# Altium PCB pcb.PcbDoc
Units mil, origin at the board's own origin, x right, y up, seen from the top; angles counter-clockwise.
Board outline 6000 x 4000 mil, 2 copper layers (Top Layer, Bottom Layer); 116 components, 74 nets, 350 pads, 0 vias.
Unrouted connection lines stored in the file: 217.
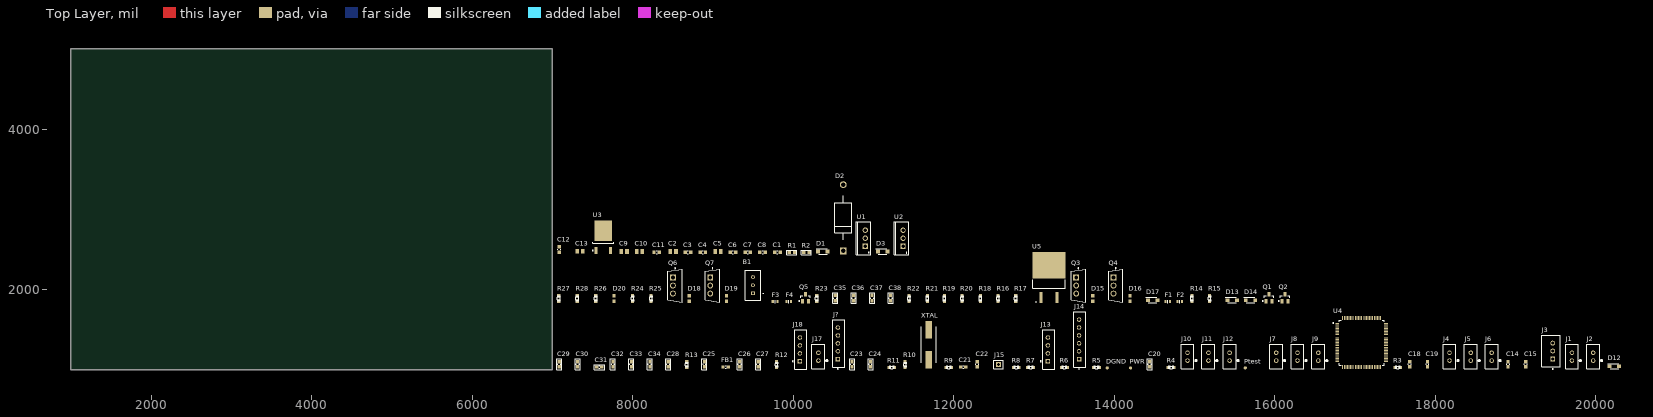
[diagram p0: Top Layer view]
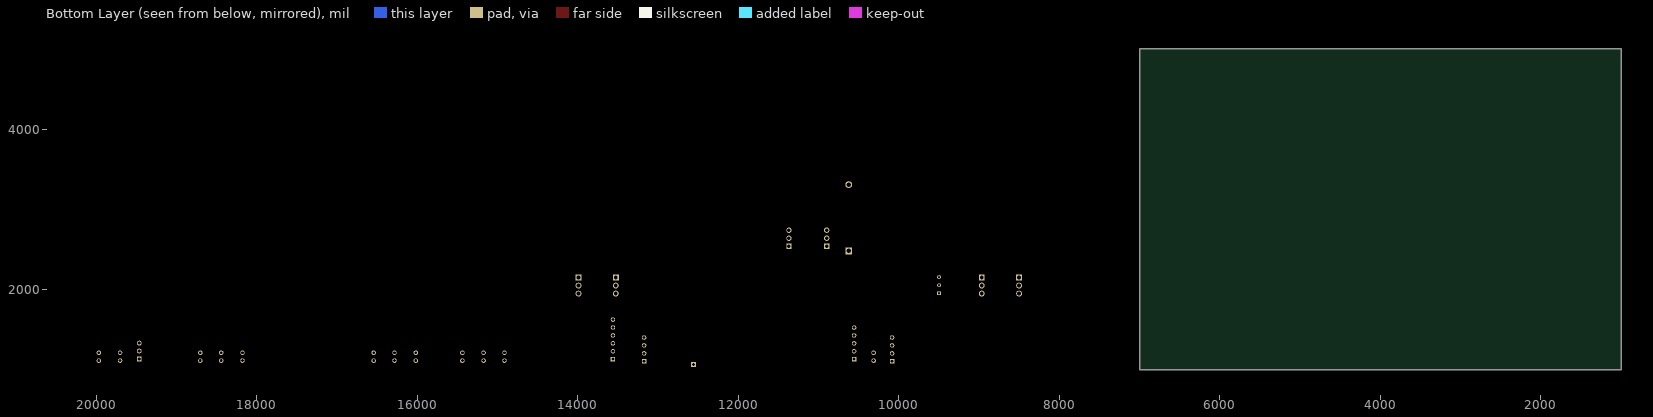
[diagram p1: Bottom Layer view, seen from below]

## Layer stack, top to bottom
Top Solder: solder mask 0.4, Solder Resist, Dk 3.5
Top Layer: signal copper 1.4
Dielectric 1: dielectric 12.6, FR-4, Dk 4.8
Bottom Layer: signal copper 1.4
Bottom Solder: solder mask 0.4, Solder Resist, Dk 3.5

## Board outline
1000,1000 7000,1000 7000,5000 1000,5000

## Design rules (kind name [scope] priority, off if disabled: settings)
Clearance [All] p1: gap=10 ignorepadtopadclearanceinfootprint=FALSE
PolygonConnect [All] p1: connectstyle=Relief reliefconductorwidth=10 reliefentries=4 polygonreliefangle="90 Angle" airgapwidth=10
RoutingVias [All] p1: holewidth=28 width=50 viastyle="Through Hole" minholewidth=28 minwidth=50 maxholewidth=28 maxwidth=50
SolderMaskExpansion [All] p1: expansion=4 istentingtop=FALSE
SupplyNets "Schematic Supply Nets_5" [InNet('MCU_BZR')] p1: voltage=0.000
SupplyNets "Schematic Supply Nets_4" [InNet('+3V3')] p2: voltage=0.000
SupplyNets "Schematic Supply Nets_3" [InNet('+24')] p3: voltage=0.000
SupplyNets "Schematic Supply Nets_2" [InNet('\')] p4: voltage=0.000
SupplyNets "Schematic Supply Nets_1" [InNet('+5V')] p5: voltage=0.000
SupplyNets "Schematic Supply Nets" [InNet('+VDC')] p6: voltage=0.000
Width [All] p1: maxlimit=10 minlimit=10 preferedwidth=10
30 further rules are at their usual default settings.

## Classes and differential pairs
component class power_reg: C1 C2 C3 C4 C5 C6 C7 C8 C9 C10 C11 C12 C13 D1 D2 D3 R1 R2 U1 U2 U3
component class mosfets: B1 C35 C36 C37 C38 D13 D14 D15 D16 D17 D18 D19 D20 F1 F2 F3 F4 Q1 Q2 Q3 Q4 Q5 Q6 Q7 R14 R15 R16 R17 R18 R19 R20 R21 R22 R23 R24 R25 R26 R27 R28 U5
component class mcu_: C14 C15 C18 C19 C20 C21 C22 C23 C24 C25 C26 C27 C28 C29 C30 C31 C32 C33 C34 D12 DGND FB1 J1 J2 J3 J4 J5 J6 J7 J8 J9 J10 J11 J12 J13 J14 J15 J17 J18 J? Ptest PWR R3 R4 R5 R6 R7 R8 R9 R10 R11 R12 R13 U4 XTAL

## Components (designator, comment, footprint, x,y, rotation, side; value= is the part's Value field where it differs from the comment)
B1 "3296W-1-502ALF" 3296W1502ALF 9500,1955 r0 top
C1 "CAP CER 1UF 25V X7R 0603" 0603cap 9805,2465 r0 top
C2 "CAP CER 10UF 25V X5R 0805" "CAPC2012X140N - duplicate" 8505,2475 r0 top
C3 "CAP CER 0.1UF 25V X7R 0603" 0603cap 8690,2465 r0 top
C4 "CAP CER 10UF 25V X5R 0805" 0603cap 8875,2465 r0 top
C5 "CAP CER 10UF 25V X5R 0805" "CAPC2012X140N - duplicate" 9065,2475 r0 top
C6 "CAP CER 0.1UF 25V X7R 0603" 0603cap 9250,2465 r0 top
C7 "CAP CER 0.1UF 25V X7R 0603" 0603cap 9435,2465 r0 top
C8 "CAP CER 1UF 25V X7R 0603" 0603cap 9620,2465 r0 top
C9 "CAP CER 10UF 25V X5R 0805" "CAPC2012X140N - duplicate" 7895,2475 r0 top
C10 "CAP CER 10UF 25V X5R 0805" "CAPC2012X140N - duplicate" 8085,2475 r0 top
C11 "CAP CER 0.1UF 25V X7R 0603" 0603cap 8300,2465 r0 top
C12 "CAP CER 0.1UF 25V X7R 0603" 0603cap 7085,2500 r90 top
C13 "CAP CER 10UF 25V X5R 0805" CAPC2012X140N 7345,2475 r0 top
C14 "CAP CER 0.1UF 25V X7R 0603" 0603cap 18910,1070 r90 top
C15 "CAP CER 0.1UF 25V X7R 0603" 0603cap 19130,1070 r90 top
C18 "CAP CER 0.1UF 25V X7R 0603" 0603cap 17685,1070 r90 top
C19 "CAP CER 0.1UF 25V X7R 0603" 0603cap 17905,1070 r90 top
C20 "C0603C104K5RAC7867" "0603 CAP" 14445,1070 r90 top
C21 "JMK107ABJ106MA-T" 0603cap 12120,1035 r0 top
C22 "JMK107ABJ106MA-T" 0603cap 12295,1070 r90 top
C23 "GCM1885C2A160JA16D" "0603 CAP" 10735,1070 r90 top
C24 "GCM1885C2A160JA16D" "0603 CAP" 10965,1070 r90 top
C25 "C0603C104K5RAC7867" "0603 CAP" 8895,1070 r90 top
C26 "C0603C104K5RAC7867" "0603 CAP" 9335,1070 r90 top
C27 "1 µF ±10% 25V Ceramic Capacitor X5R 0603" "0603 CAP" 9565,1070 r90 top
C28 "1 µF ±10% 25V Ceramic Capacitor X5R 0603" "0603 CAP" 8445,1070 r90 top
C29 "C0603C104K5RAC7867" "0603 CAP" 7085,1070 r90 top
C30 "C0603C104K5RAC7867" "0603 CAP" 7315,1070 r90 top
C31 "C0603C104K5RAC7867" "0603 CAP" 7585,1035 r0 top
C32 "C0603C104K5RAC7867" "0603 CAP" 7755,1070 r90 top
C33 "C0603C104K5RAC7867" "0603 CAP" 7985,1070 r90 top
C34 "C0603C104K5RAC7867" "0603 CAP" 8215,1070 r90 top
C35 "1 µF ±10% 25V Ceramic Capacitor X5R 0603" "0603 CAP" 10525,1895 r90 top
C36 "1 µF ±10% 25V Ceramic Capacitor X5R 0603" "0603 CAP" 10755,1895 r90 top
C37 "1 µF ±10% 25V Ceramic Capacitor X5R 0603" "0603 CAP" 10985,1895 r90 top
C38 "1 µF ±10% 25V Ceramic Capacitor X5R 0603" "0603 CAP" 11215,1895 r90 top
D1 "NTS260SFT1G" SODFL3616X98N 10370,2475 r0 top
D2 "1N5822" FP-DO-201AD-MFG 10625,2895 r90 top
D3 "NTS260SFT1G" SODFL3616X98N 11115,2475 r0 top
D12 "NTS260SFT1G" SODFL3616X98N 20235,1045 r0 top
D13 "NTS260SFT1G" SODFL3616X98N 15470,1870 r0 top
D14 "NTS260SFT1G" SODFL3616X98N 15700,1870 r0 top
D15 "HL-PST-1608H203BC" 0603Diode 13735,1890 r90 top
D16 "HL-PST-1608H203BC" 0603Diode 14200,1890 r90 top
D17 "NTS260SFT1G" SODFL3616X98N 14480,1870 r0 top
D18 "HL-PST-1608H203BC" 0603Diode 8705,1890 r90 top
D19 "HL-PST-1608H203BC" 0603Diode 9170,1890 r90 top
D20 "LED" 0603Diode 7770,1890 r90 top
DGND "" "TEST POINT" 13915,1025 r90 top
F1 "ERB-RE1R00V" FP-ERBRE-MFG 14670,1850 r0 top
F2 "ERB-RE1R00V" FP-ERBRE-MFG 14820,1850 r0 top
F3 "ERB-RE1R00V" FP-ERBRE-MFG 9775,1850 r0 top
F4 "ERB-RE1R00V" FP-ERBRE-MFG 9945,1850 r0 top
FB1 "BLM18AG601SN1D" 0603cap 9160,1035 r0 top
J1 "JST CONN HEADER VERT 2POS 2.5MM" "CONN_B2B-EH-A (LF)(SN)_JST" 19705,1115 r90 top
J2 "JST CONN HEADER VERT 2POS 2.5MM" "CONN_B2B-EH-A (LF)(SN)_JST" 19970,1115 r90 top
J3 "JST CONN HEADER VERT 3POS 2.5MM" JST_B3B-XH-A(LF)(SN) 19445,1235 r90 top
J4 "JST CONN HEADER VERT 2POS 2.5MM" "CONN_B2B-EH-A (LF)(SN)_JST" 18180,1115 r90 top
J5 "JST CONN HEADER VERT 2POS 2.5MM" "CONN_B2B-EH-A (LF)(SN)_JST" 18445,1115 r90 top
J6 "JST CONN HEADER VERT 2POS 2.5MM" "CONN_B2B-EH-A (LF)(SN)_JST" 18705,1115 r90 top
J7 "JST CONN HEADER VERT 2POS 2.5MM" "CONN_B2B-EH-A (LF)(SN)_JST" 16020,1115 r90 top
J8 "JST CONN HEADER VERT 2POS 2.5MM" "CONN_B2B-EH-A (LF)(SN)_JST" 16285,1115 r90 top
J9 "JST CONN HEADER VERT 2POS 2.5MM" "CONN_B2B-EH-A (LF)(SN)_JST" 16545,1115 r90 top
J10 "JST CONN HEADER VERT 2POS 2.5MM" "CONN_B2B-EH-A (LF)(SN)_JST" 14915,1115 r90 top
J11 "JST CONN HEADER VERT 2POS 2.5MM" "CONN_B2B-EH-A (LF)(SN)_JST" 15175,1115 r90 top
J12 "JST CONN HEADER VERT 2POS 2.5MM" "CONN_B2B-EH-A (LF)(SN)_JST" 15440,1115 r90 top
J13 "B4B-EH-A(LF)(SN)" JST-B4B-EH-A_V 13175,1255 r90 top
J14 "B6B-EH-A(LF)(SN)" FP-B6B-EH-A_LF_SN-MFG 13575,1380 r90 top
J15 "TSW-101-07-L-S" FP-TSW-101-07-L-S-MFG 12560,1065 r0 top
J17 "JST CONN HEADER VERT 2POS 2.5MM" "CONN_B2B-EH-A (LF)(SN)_JST" 10315,1115 r90 top
J18 "B4B-EH-A(LF)(SN)" JST-B4B-EH-A_V 10085,1255 r90 top
J? "B5B-EH-A(LF)(SN)" FP-B5B-EH-A_LF_SN-MFG 10570,1330 r90 top
Ptest "" "TEST POINT" 15635,1025 r90 top
PWR "" "TEST POINT" 14205,1025 r90 top
Q1 "BSS123" FAIR-SOT23-3_V 15930,1900 r0 top
Q2 "BSS123" FAIR-SOT23-3_V 16130,1900 r0 top
Q3 "IRLZ44NPbF" FP-PG-TO220-3-MFG 13555,2050 r0 top
Q4 "IRLZ44NPbF" FP-PG-TO220-3-MFG 14020,2050 r0 top
Q5 "BSS123" FAIR-SOT23-3_V 10155,1900 r0 top
Q6 "IRLZ44NPbF" FP-PG-TO220-3-MFG 8530,2050 r0 top
Q7 "IRLZ44NPbF" FP-PG-TO220-3-MFG 8995,2050 r0 top
R1 "RC0603JR-0727RL" "0603 RES" 9985,2465 r0 top
R2 "RC0603JR-0727RL" "0603 RES" 10165,2465 r0 top
R3 "Res  0603 10K Ohm 1% 1/10W" 0603RES 17535,1030 r0 top
R4 "Res  0603 10K Ohm 1% 1/10W" 0603RES 14710,1030 r0 top
R5 "Res  0603 10K Ohm 1% 1/10W" 0603RES 13780,1030 r0 top
R6 "2.2R Ohms Jumper Chip Resistor 0603" 0603RES 13380,1030 r0 top
R7 "TC0325F1004T5F" 0603RES 12960,1030 r0 top
R8 "2.2R Ohms Jumper Chip Resistor 0603" 0603RES 12780,1030 r0 top
R9 "2.2R Ohms Jumper Chip Resistor 0603" 0603RES 11940,1030 r0 top
R10 "2.2R Ohms Jumper Chip Resistor 0603" 0603RES 11395,1065 r90 top
R11 "0 Ohms Jumper Chip Resistor 0603" 0603RES 11230,1030 r0 top
R12 "CQ03SAF470JT5E" 0603RES 9795,1065 r90 top
R13 "0 Ohms Jumper Chip Resistor 0603" 0603RES 8675,1065 r90 top
R14 "CQ03SAF470JT5E" 0603RES 14970,1890 r90 top
R15 "CQ03SAF470JT5E" 0603RES 15190,1890 r90 top
R16 "CQ03SAF470JT5E" 0603RES 12555,1890 r90 top
R17 "CQ03SAF470JT5E" 0603RES 12775,1890 r90 top
R18 "0 Ohms Jumper Chip Resistor 0603" 0603RES 12335,1890 r90 top
R19 "CQ03SAF470JT5E" 0603RES 11885,1890 r90 top
R20 "CQ03SAF470JT5E" 0603RES 12105,1890 r90 top
R21 "CQ03SAF470JT5E" 0603RES 11675,1890 r90 top
R22 "CQ03SAF470JT5E" 0603RES 11445,1890 r90 top
R23 "CQ03SAF470JT5E" 0603RES 10295,1890 r90 top
R24 "CQ03SAF470JT5E" 0603RES 8000,1890 r90 top
R25 "CQ03SAF470JT5E" 0603RES 8230,1890 r90 top
R26 "CQ03SAF470JT5E" 0603RES 7540,1890 r90 top
R27 "CQ03SAF470JT5E" 0603RES 7080,1890 r90 top
R28 "CQ03SAF470JT5E" 0603RES 7310,1890 r90 top
U1 "L7812CV" TO220 10900,2640 r90 top
U2 "L7805ABV" TO220 11370,2640 r90 top
U3 "LD1117ADT18TR" TO-252_N 7635,2655 r90 top
U4 "STM32F407VGT6" FP-LQFP100-1L-MFG 17085,1340 r0 top
U5 "LM317BD2TG" FP-936-03-MFG 13190,2200 r0 top
XTAL "ATS080BSM-1" ATS080BSM-1 10300,2215 r90 top

## Footprints (in the part's own frame and the unit in brackets; to place one, negate y for a bottom-side part, rotate by r counter-clockwise, add the part's x,y. Pads: shape width x height; smd on the part's side, far side on the other; paste and mask are expansions set on the pad)
"0603 CAP" [mm]
  rect 1.1x1 smd: 1(-0.85,0) 2(0.85,0)
  silkscreen extent -1.67,-0.78 1.67,0.78, body extent -0.8,-0.46 0.8,0.44, height 0.79
"0603 RES" [mm]
  rect 1.1x1 smd: 1(-0.85,0) 2(0.85,0)
  silkscreen extent -1.6,-0.7 1.6,0.7, body extent -0.8,-0.41 0.8,0.41, height 0.45
0603cap [mm]
  rect 1.1x1 smd: 1(-0.85,0) 2(0.85,0)
  silkscreen extent -0.15,-0.45 0.15,0.45, body extent -0.8,-0.46 0.8,0.44, height 0.79
0603Diode [mm]
  rect 1.1x1 smd: A(0.85,0) C(-0.85,0)
  body extent -0.8,-0.4 0.8,0.4, height 0.65
0603RES [mm]
  rect 1.1x1 smd: 1(-0.85,0) 2(0.85,0)
  silkscreen extent -0.84,-0.47 0.83,0.48, body extent -0.8,-0.41 0.8,0.41, height 0.45
3296W1502ALF [mm]
  rect 1.217x1.217 hole 0.71: 1(0,0)
  round 1.217 hole 0.71: 2(0,2.54) 3(0,5.08)
  silkscreen extent -2.42,-2.22 3.3,7.3
ATS080BSM-1 [mm]
  rect 5.6x2.1 smd: 1(-27.676,-35.296) 2(-18.176,-35.296)
  silkscreen extent -28.63,-37.65 -17.23,-32.95, body extent -29.28,-37.65 -16.58,-32.95, height 3.16
CAPC2012X140N [mm]
  rect 1.08x1.42 smd: 1(-0.895,0) 2(0.895,0)
  body extent -1,-0.63 1,0.63, height 1.4
"CAPC2012X140N - duplicate" [mm]
  rect 1.15x1.45 smd: 1(-0.9,0) 2(0.9,0)
  body extent -1,-0.63 1,0.63, height 1.02
"CONN_B2B-EH-A (LF)(SN)_JST" [mil]
  round 55 hole 35 mask+0: 1(0,0) 2(98.43,0)
  silkscreen extent -103,-115 202,80, body extent 0,0 10,10, height 10
FAIR-SOT23-3_V [mm] "SOT23, 3-Leads, Body 2.92x1.3mm, Pitch 0.95mm"
  rect 1x1.4 smd: 1(-0.95,-1.1) 2(0.95,-1.1) 3(0,1.1)
  silkscreen extent -2.12,-1.22 1.46,0.65, body extent -1.46,-0.65 1.46,0.65, height 1.2
FP-936-03-MFG [mil]
  rect 40x137.95 smd paste+0 mask+0: 1(-100,-297.55) 3(100,-297.55)
  rect 412.99x329.92 smd paste+0 mask+0: 4(0,104.54)
  silkscreen extent -201,-358 201,-75, body extent -218,-370 218,273, height 10
FP-B5B-EH-A_LF_SN-MFG [mm]
  rect 1.4x1.4 hole 0.9 paste-2539.97 mask+0: 1(-5,0.3)
  round 1.4 hole 0.9 paste-2539.97 mask+0: 2(-2.5,0.3) 3(0,0.3) 4(2.5,0.3) 5(5,0.3)
  silkscreen extent -8.22,-1.9 7.5,1.9, body extent -7.6,-2 7.6,2, height 0.25
FP-B6B-EH-A_LF_SN-MFG [mm]
  rect 1.4x1.4 hole 0.9 paste-2539.97 mask+0: 1(-6.25,0.3)
  round 1.4 hole 0.9 paste-2539.97 mask+0: 2(-3.75,0.3) 3(-1.25,0.3) 4(1.25,0.3) 5(3.75,0.3) 6(6.25,0.3)
  silkscreen extent -9.47,-1.9 8.75,1.9, body extent -8.85,-2 8.85,2, height 0.25
FP-DO-201AD-MFG [mm]
  rect 2.2x2.2 hole 1.45 paste-2539.97 mask+0: 1(-10.47,0)
  round 2.2 hole 1.45 paste-2539.97 mask+0: 2(10.47,0)
  silkscreen extent -7,-2.65 7,2.65, body extent -11.67,-2.75 11.67,2.75, height 0.25
FP-ERBRE-MFG [mm]
  rect 0.65x0.9 smd: 1(-0.725,0) 2(0.725,0)
  silkscreen extent 0,-0.48 0,0.48, body extent -1.15,-0.58 1.15,0.58, height 0.25
FP-LQFP100-1L-MFG [mm]
  rect 1.2x0.3 smd paste+0 mask+0: 1(-7.75,6) 2(-7.75,5.5) 3(-7.75,5) 4(-7.75,4.5) 5(-7.75,4) 6(-7.75,3.5) 7(-7.75,3) 8(-7.75,2.5) 9(-7.75,2) 10(-7.75,1.5) 11(-7.75,1) 12(-7.75,0.5) 13(-7.75,0) 14(-7.75,-0.5) 15(-7.75,-1) 16(-7.75,-1.5) 17(-7.75,-2) 18(-7.75,-2.5) 19(-7.75,-3) 20(-7.75,-3.5) 21(-7.75,-4) 22(-7.75,-4.5) 23(-7.75,-5) 24(-7.75,-5.5) 25(-7.75,-6) 51(7.75,-6) 52(7.75,-5.5) 53(7.75,-5) 54(7.75,-4.5) 55(7.75,-4) 56(7.75,-3.5) 57(7.75,-3) 58(7.75,-2.5) 59(7.75,-2) 60(7.75,-1.5) 61(7.75,-1) 62(7.75,-0.5) 63(7.75,0) 64(7.75,0.5) 65(7.75,1) 66(7.75,1.5) 67(7.75,2) 68(7.75,2.5) 69(7.75,3) 70(7.75,3.5) 71(7.75,4) 72(7.75,4.5) 73(7.75,5) 74(7.75,5.5) 75(7.75,6)
  rect 0.3x1.2 smd paste+0 mask+0: 26(-6,-7.75) 27(-5.5,-7.75) 28(-5,-7.75) 29(-4.5,-7.75) 30(-4,-7.75) 31(-3.5,-7.75) 32(-3,-7.75) 33(-2.5,-7.75) 34(-2,-7.75) 35(-1.5,-7.75) 36(-1,-7.75) 37(-0.5,-7.75) 38(0,-7.75) 39(0.5,-7.75) 40(1,-7.75) 41(1.5,-7.75) 42(2,-7.75) 43(2.5,-7.75) 44(3,-7.75) 45(3.5,-7.75) 46(4,-7.75) 47(4.5,-7.75) 48(5,-7.75) 49(5.5,-7.75) 50(6,-7.75) 76(6,7.75) 77(5.5,7.75) 78(5,7.75) 79(4.5,7.75) 80(4,7.75) 81(3.5,7.75) 82(3,7.75) 83(2.5,7.75) 84(2,7.75) 85(1.5,7.75) 86(1,7.75) 87(0.5,7.75) 88(0,7.75) 89(-0.5,7.75) 90(-1,7.75) 91(-1.5,7.75) 92(-2,7.75) 93(-2.5,7.75) 94(-3,7.75) 95(-3.5,7.75) 96(-4,7.75) 97(-4.5,7.75) 98(-5,7.75) 99(-5.5,7.75) 100(-6,7.75)
  silkscreen extent -9.12,-7.1 7.1,7.1, body extent -8.45,-8.45 8.45,8.45, height 0.25
FP-PG-TO220-3-MFG [mm]
  rect 1.85x1.85 hole 1.2 paste-2539.97 mask+0: 1(-0.705,2.54)
  round 1.85 hole 1.2 paste-2539.97 mask+0: 2(-0.705,0) 3(-0.705,-2.54)
  silkscreen extent -2.27,-5.2 2.27,5.62, body extent -2.37,-5.55 2.37,5.55, height 0.25
FP-TSW-101-07-L-S-MFG [mm]
  rect 1.57x1.57 hole 1.02 paste-2539.97 mask+0: 1(0,0)
  silkscreen extent -1.46,-1.34 1.46,1.34, body extent -1.56,-1.44 1.56,1.44, height 0.25
JST-B4B-EH-A_V [mm] "Header, 4-Leads, Body 12.5x3.8mm, Pitch 2.5mm"
  rect 1.4x1.4 hole 0.9: 1(-3.75,0)
  round 1.4 hole 0.9: 2(-1.25,0) 3(1.25,0) 4(3.75,0)
  silkscreen extent -6.25,-2.2 6.25,2.37, body extent -6.25,-2.2 6.25,1.6, height 6
JST_B3B-XH-A(LF)(SN) [mm]
  rect 1.508x1.508 / inner round 1.508 / far side rect 1.508x1.508 hole 1: 1(-2.5,-0.525)
  round 1.508 hole 1: 2(0,-0.525) 3(2.5,-0.525)
  silkscreen extent -5.8,-2.88 4.95,2.88, body extent -4.95,-2.88 4.95,2.88, height 7
SODFL3616X98N [mm]
  rect 1.24x1.12 smd: 1(-1.5,0) 2(1.5,0)
  silkscreen extent -2.12,-0.82 1.35,0.82
"TEST POINT" [mm]
  round 1 smd mask+0.05: TP(0,0)
TO220 [mm] "TO, Thru-Hole, Vertical, Heatsink Mounted; 3 In-Line Leads; Pitch 2.54 mm"
  rect 1.7x1.7 hole 1.1: 1(-2.54,0)
  round 1.7 hole 1.1: 2(0,0) 3(2.54,0)
  silkscreen extent -5.2,-1.75 5.2,2.85, body extent -5.25,-1.8 5.25,2.9, height 19.7
TO-252_N [mm] "D-PAK, 4-Leads, Body 6.1x6.5mm, Pitch 2.28mm, Lead Span 9.7mm, IPC Medium Density"
  rect 2.1x0.95 smd: 1(-4.25,2.28) 3(-4.25,-2.28)
  rect 6.5x5.5 smd: 4(2.05,0)
  silkscreen extent -4.37,-3.3 -1.6,3.43, body extent -2,-3.3 4.2,3.3, height 2.4

## Part data
B1: "Trimmer Resistors - Through Hole 3/8\" 5Kohms Sealed Vertical Adjust", Manufacturer_Name=Bourns, Mouser Part Number=652-3296W-1-502ALF, Arrow Part Number=3296W-1-502ALF, Arrow Price/Stock=https://www.arrow.com/en/products/3296w-1-502alf/bourns?utm_currency=USD&region=nac, Datasheet Link=https://www.bourns.com/docs/Product-Datasheets/3296.pdf, Geometry.Height=11.8mm, Manufacturer_Part_Number=3296W-1-502ALF, Mouser Price/Stock=https://www.mouser.co.uk/ProductDetail/Bourns/3296W-1-502ALF?qs=2esLye6h6wF9Wpw2gFsopg%3D%3D
C1 C8: "1 µF ±10% 25V Ceramic Capacitor X7R 0603 (1608 Metric)", Capacitance=1µF, Manufacturer="Samsung Electro-Mechanics", Manufacturer PN=CL10B105KA8NNNC, Supplier Part Number 1=1276-1184-1-ND, Supplier=Digikey, Supplier 1=Digi-Key, Supplier PN=1276-1184-1-ND
C2 C4 C5 C9 C13: "10 µF ±20% 25V Ceramic Capacitor X5R 0805 (2012 Metric)", Capacitance=10µF, Supplier Part Number 1=490-10748-1-ND, Supplier 1=Digi-Key
C3 C6 C7 C11 C12 C14 C15 C18 C19: "0.1 µF ±5% 25V Ceramic Capacitor X7R 0603 (1608 Metric)", Capacitance="0.1 µF", Manufacturer PN=C0603C104J3RACAUTO, Supplier Part Number 1=399-12996-1-ND, Supplier 1=Digi-Key, Supplier PN=399-12996-1-ND
C10: "10 µF ±20% 25V Ceramic Capacitor X5R 0805 (2012 Metric)", Capacitance=220µF, Supplier Part Number 1=490-10748-1-ND, Supplier 1=Digi-Key
C20 C25 C26 C29 C30 C31 C32 C33 C34: "Ceramic Capacitors  SMD 50volts 0.1uF X7R 10%", Capacitance=100nF, ComponentLink1Description="Supplier Link", Supplier=OZDISAN
  C20 C25 C26 C31 C32 C33 C34: ComponentLink1URL=https://www.ozdisan.com/pasif-komponentler/kondansatorler/smt-smd-ve-mlcc-kondansatorler/CL10B104KB8NNNC, Supplier PN=CL10B104KB8NNNC
  C29 C30: ComponentLink1URL=https://www.ozdisan.com/pasif-komponentler/kondansatorler/smt-smd-ve-mlcc-kondansatorler/CL10A105KO8NNNC, Supplier PN=CL10A105KO8NNNC
C21 C22: library part GRM188R61E225KA12D, "2.2 µF ±10% 25V Ceramic Capacitor X5R 0603", Capacitance=2u2, Case Code (Imperial)=0603, Case Code (Metric)=1608, Dielectric=X5R, Manufacturer=Murata, Max Operating Temperature=85°C, Min Operating Temperature=-55°C, Package Quantity=4000, Resistor Type=Ceramic, Supplier Part Number 1=490-10731-1-ND, Tolerance=10%, Voltage=25V, Case/Package=0603, Category="Ceramic Capacitors", ComponentLink1Description=https://datasheet.ciiva.com/22706/1747460-22706787.pdf?src-supplier=Element14, ComponentLink1URL=https://datasheet.ciiva.com/22706/1747460-22706787.pdf?src-supplier=Element14, ComponentLink2Description=https://datasheet.ciiva.com/7719/1747460-7719045.pdf?src-supplier=Element14, ComponentLink2URL=https://datasheet.ciiva.com/7719/1747460-7719045.pdf?src-supplier=Element14, ComponentLink3Description=https://datasheet.ciiva.com/14116/grmseries-highdielectrictype-eng-14116409.pdf?src-supplier=Distrelec, ComponentLink3URL=https://datasheet.ciiva.com/14116/grmseries-highdielectrictype-eng-14116409.pdf?src-supplier=Distrelec, Construction=Flat, Depth=0.8mm, Designed By=Baran, Height=0.8mm, Lead Free="Lead Free", Length=1.6mm, Manufacturer Part Number=GRM188R61E225KA12D, Material=Ceramic, Mount="Surface Mount", Number of Pins=2, Packaging="Tape and Reel", Pricing 1="1=0.17000, 10=0.12200, 50=0.06940, 100=0.05750, 500=0.04034, 1000=0.03339 (USD)", Radiation Hardening=No, REACH SVHC="No SVHC", RoHS=Yes, RoHS Compliant=Yes, Series=GRM, Stock 1=503975, Supplier 1=Digi-Key, Termination=SMD/SMT, Thickness=0.035inch, Voltage Rating=25V, Voltage Rating (DC)=25V, Weight=0.000222oz, Width=0.8mm
C23 C24: library part C0603C104K5RAC7867, "18 pF ±5% 50V Ceramic Capacitor C0G, NP0 0603 (1608 Metric)", Capacitance=18pF, ComponentLink1Description="Supplier Link", ComponentLink1URL=https://www.ozdisan.com/pasif-komponentler/kondansatorler/smt-smd-ve-mlcc-kondansatorler/CL10C180JB81PNC, Supplier=OZDISAN, Supplier PN=CL10C180JB81PNC
C27 C28: library part C0603C104K5RAC7867, Capacitance=1uF, ComponentLink1Description="Supplier Link", ComponentLink1URL=https://www.ozdisan.com/pasif-komponentler/kondansatorler/smt-smd-ve-mlcc-kondansatorler/CL10A105KO8NNNC, Supplier=OZDISAN, Supplier PN=CL10A105KO8NNNC
C35 C37: library part C0603C104K5RAC7867, Capacitance=100n, ComponentLink1Description="Supplier Link", ComponentLink1URL=https://www.ozdisan.com/pasif-komponentler/kondansatorler/smt-smd-ve-mlcc-kondansatorler/CL10A105KO8NNNC, Supplier=OZDISAN, Supplier PN=CL10A105KO8NNNC
C36 C38: library part C0603C104K5RAC7867, Capacitance=1u, ComponentLink1Description="Supplier Link", ComponentLink1URL=https://www.ozdisan.com/pasif-komponentler/kondansatorler/smt-smd-ve-mlcc-kondansatorler/CL10A105KO8NNNC, Supplier=OZDISAN, Supplier PN=CL10A105KO8NNNC
D1 D3 D12 D13 D14 D17: "Fine Lithography Trenchbased Schottky Technology for Very Low Forward Voltage and Low Leakage; Fast Switching with Exceptional Temperature Stability; Low Power Loss and Lower Operating Temperature; Higher Efficiency for Achieving Regulatory Compliance; Low Thermal Resistance; High Surge Capability; These are PbFree and HalideFree Devices", Manufacturer_Name=onsemi, Mouser Part Number=863-NTS260SFT1G, Arrow Part Number=NTS260SFT1G, Arrow Price/Stock=https://www.arrow.com/en/products/nts260sft1g/on-semiconductor, Datasheet Link=https://www.onsemi.com/pub/Collateral/NTS260SF-D.PDF, Geometry.Height=0.98mm, Manufacturer_Part_Number=NTS260SFT1G, Mouser Price/Stock=https://www.mouser.co.uk/ProductDetail/onsemi/NTS260SFT1G?qs=k6dkFvHqcvCML1heMZjMng%3D%3D
D2: library part CMP-12187-000025-1, "DIODE SCHOTTKY 40V 3A DO201AD", Forward Current=3A, Manufacturer=STMicroelectronics, Max Junction Temp=+150°C, Max Repetitive Reverse Voltage=40V, Max Surge Forward Current=80A, Package=DO-201AD, Peak Reverse Current=2mA, Temperature="to +150°C", Automotive=No, Category=Diode, ComponentLink2Description=Datasheet, ComponentLink2URL=https://www.st.com/resource/en/datasheet/1n5822.pdf, Device Class L1="Discrete Semiconductors", Device Class L2=Diodes, Device Class L3="Schottky Diodes", Digikey Description="DIODE SCHOTTKY 40V 3A DO201AD", Height=5.3mm, Lead Free=Yes, Manufacturer Part Number=1N5822, Mouser Description="Schottky Diodes & Rectifiers Vr/40V Io/3A BULK", Octopart=https://octopart.com/1n5822-stmicroelectronics-323225, RoHS=TRUE, Temperature Range High=+150°C
D15 D16 D18 D19: "LED SMD 0603 BLUE 100mcd 120° WATER CLEAR", ComponentLink9Description="Supplier Link", ComponentLink9URL=https://www.ozdisan.com/led-ve-aydinlatma-cozumleri/led-komponentler/sinyal-ledler-renkli/HL-PST-1608H203BC, Supplier=OZDISAN, Supplier PN=HL-PST-1608H203BC
D20: library part HL-PST-1608H203BC, "LED SMD 0603 BLUE 100mcd 120° WATER CLEAR", ComponentLink9Description="Supplier Link", ComponentLink9URL=https://www.ozdisan.com/led-ve-aydinlatma-cozumleri/led-komponentler/sinyal-ledler-renkli/HL-PST-1608H203BC, Supplier=OZDISAN, Supplier PN=HL-PST-1608H203BC
DGND PWR: library part "Test Point_2", "PROBE PAD", ComponentLink1Description=Datasheet, Mounting Type="Surface Mount", Type="PC Test Point"
F1 F2 F3 F4: library part CMP-00287-21220537-1, "ERB-RE1R00V Fuse Chip Fast Acting 1A 32V SMD Solder Pad 0603 1.6 X 0.8 X 0.54mm T/R UL/cUL", Case Code (Imperial)=0603, Case Code (Metric)=1608, Current=1A, Max Operating Temperature=125°C, Max Voltage Rating (DC)=32V, Min Operating Temperature=-40°C, Resistance=125mΩ, Approvals=UL, Body Material=Alumina, Case/Package=0603, Current Rating=1A, Depth=800µm, Fuse Current=1A, Height=640µm, Lead Free="Lead Free", Length=1.6mm, Lifecycle Status=Production, Mount="Surface Mount", Number of Pins=2, Packaging="Cut Tape", Radiation Hardening=No, REACH SVHC="No SVHC", RoHS=Compliant, Voltage Rating=32V, Voltage Rating (DC)=32V, Width=800µm
FB1: library part FBMH1608HM102-TV, "FERRITE BEAD 0603 600R 500MA MURATA", Max. Current=500mA, Test Frequency=100MHz, ComponentLink1Description="Supplier Link", ComponentLink1URL=https://www.ozdisan.com/pasif-komponentler/induktorler/bead-feritler/BLM18AG601SN1D, Impedance=600R, Supplier=OZDISAN, Supplier PN=BLM18AG601SN1D
J1 J2 J4 J5 J6 J7 J8 J9 J10 J11 J12 J17: library part "B2B-EH-A (LF)(SN)", "Connector Header Through Hole 2 position 0.098\" (2.50mm)", Manufacturer PN=B2B-EH-A(LF)(SN), Mfr_Name=JST, Copyright="Copyright (C) 2023 Ultra Librarian. All rights reserved.", Digi-Key_Part_Number_1=455-1611-ND, Manufacturer_Part_Number="B2B-EH-A (LF)(SN)", RefDes=RefDes, Supplier PN=455-1611-ND, Type=DEV
J3: library part B3B-XH-A(LF)(SN), "Connector Header Through Hole 3 position 0.098\" (2.50mm)", Package=None, Availability="In Stock", Check_prices=https://www.snapeda.com/parts/B3B-XH-A(LF)(SN)/JST+Sales+America+Inc./view-part/?ref=eda, Manufacturer PN=B3B-XH-A(LF)(SN), MF="JST Sales", MP=B3B-XH-A(LF)(SN), Price=None, Purchase-URL=https://pricing.snapeda.com/search/part/B3B-XH-A(LF)(SN)/?ref=eda, SnapEDA_Link=https://www.snapeda.com/parts/B3B-XH-A(LF)(SN)/JST+Sales+America+Inc./view-part/?ref=snap, Supplier PN=455-2248-ND
J13 J18: library part CMP-2000-05904-1, "Male Header, Pitch 2.5 mm, 1 x 4 Position, Height 6 mm, Tail Length 3.2 mm, -25 to 85 degC, RoHS, Bulk", Manufacturer=JST, Package Description="Male Header, Pitch 2.5 mm, 1 x 4 Position, Height 6 mm, Tail Length 3.2 mm", Package Reference=B4B-EH-A, Datasheet URL=http://www.jst-mfg.com/product/pdf/eng/eEH.pdf, Datasheet Version=12/2012, Manufacturer URL=http://www.jst.com/home2.html, Mounting Technology=SurfaceMount, No of Positions=4, Pitch=2.5mm, Style/Orientation=StraightHeader/Plug, Termination=Crimp, Type=ShroudedHeader
J14: library part CMP-17439-000293-1, "CONN HEADER VERT 6POS 2.5MM", Color=Natural, Current Rating=3A, Flammability Rating="UL94 V-0", Housing Color=White, Voltage Rating=250V, Connector Type=Header, Contact Finish - Mating=TIN, Contact Material=Brass, Contact Mating Length=0.13inch, Contact Plating=Tin, Contact Shape=Square, Contact Type="Male Pin", Fastening Type=Friction, Gender=Male, Insulation Color=Natural, Insulation Material=Nylon, Lead Free="Lead Free", Mated Stacking Heights=8.1mm, Mount="Through Hole", Number of Contacts=6, Number of Positions=6, Number of Rows=1, Orientation=Straight, Packaging=Bulk, Pitch=2.5mm, Series=EH, Termination=Solder
J15: library part CMP-02766-001775-1, "CONN HEADER VERT 1POS", Color=Black, Flammability Rating="UL94 V-0", Max Current Rating=7.6A, Max Operating Temperature=125°C, Max Voltage Rating (AC)=550V, Min Operating Temperature=-55°C, Connector Type=Header, Contact Finish - Mating=GOLD, Contact Material=Bronze, Contact Mating Length=0.23inch, Contact Plating=Gold, Contact Shape=Square, Contact Type="Male Pin", Depth=2.54mm, Fastening Type=Pull, Gender=Male, Housing Color=Black, Housing Material=Polyester, Insulation Color=Black, Insulation Material=PBT, Lead Free="Lead Free", Length=2.54mm, Mount="Through Hole", Number of Contacts=1, Number of Positions=1, Number of Rows=1, Orientation=Straight, Packaging=Bulk, Radiation Hardening=No, Reach SVHC Compliant=Yes, RoHS Compliant=Yes, Series=TSW, Termination=Solder, Width=2.54mm
J?: library part CMP-17439-000382-1, "CONN HEADER VERT 5POS 2.5MM", Color=Natural, Current Rating=3A, Flammability Rating="UL94 V-0", Housing Color=White, Voltage Rating=250V, Connector Type=Header, Contact Finish - Mating=TIN, Contact Material=Brass, Contact Mating Length=0.13inch, Contact Plating=Tin, Contact Shape=Square, Contact Type="Male Pin", Fastening Type=Friction, Gender=Male, Insulation Color=Natural, Insulation Material=Nylon, Lead Free="Lead Free", Mated Stacking Heights=8.1mm, Mount="Through Hole", Number of Contacts=5, Number of Positions=5, Number of Rows=1, Orientation=Straight, Packaging=Bulk, Pitch=2.5mm, Series=EH, Termination=Solder
Ptest: library part "Test Point_2", "Ptest", ComponentLink1Description=Datasheet, Mounting Type="Surface Mount", Type="PC Test Point"
Q1 Q2 Q5: library part CMP-2000-04934-1, "N-Channel Logic Level Enhancement Mode Field Effect Transistor, 1.7 V, -55 to 150 degC, 3-Pin SOT-23, RoHS, Tape and Reel", Manufacturer=Fairchild, Maximum Continuous Drain Current=0.17A, Maximum Drain Source Voltage=100V, Maximum Gate Source Voltage=±20V, Operating Temperature=-55to150degC, Package=3SOT-23, Package Description="3-Pin Small Outline Transistor, Body 2.92 x 1.325 mm, Pitch 0.95 mm", Package Reference=SOT23-3, Package Version="Rev. 12, 03/2016", Category=MOSFET, Channel Mode=Enhancement, Channel Type=N, Datasheet URL=https://www.fairchildsemi.com/datasheets/BS/BSS123.pdf, Datasheet Version=Jun-03, Manufacturer URL=https://www.fairchildsemi.com/, Mounting=SurfaceMount, Package URL=http://www.fairchildsemi.com/dwg/MA/MA03D.pdf, Packaging=Tape&Reel, Rad Hard=No, RDS-on=6000@10VmOhm, Typical Fall Time=2.4ns, Typical Rise Time=9ns, Typical Turn-Off Delay Time=17ns, Typical Turn-On Delay Time=1.7ns
Q3 Q4 Q6 Q7: library part CMP-32901-000488-1, "MOSFET N-CH 55V 47A TO220AB", Case/Package=TO-220, Continuous Drain Current (ID)=47A, Drain to Source Breakdown Voltage=55V, Drain to Source Resistance=35mR, Gate to Source Voltage (Vgs)=16V, Input Capacitance=1.7nF, Max Operating Temperature=175°C, Max Power Dissipation=110W, Min Operating Temperature=-55°C, Threshold Voltage=2V, Drain to Source Voltage (Vdss)=55V, Element Configuration=Single, Halogen Free="Halogen Free", Height=0.6inch, Lead Free="Lead Free", Length=0.414inch, Max Dual Supply Voltage=55V, Mount="Through Hole", Number of Pins=3, Packaging=Rail/Tube, Power Dissipation=110W, Rds On Max=22mR, REACH SVHC="No SVHC", RoHS Compliant=Yes, Turn-Off Delay Time=26ns, Turn-On Delay Time=11ns, Width=0.185inch
R1: library part "RES 27 OHM 5% 1/10W 0603", "RES 27 OHM 5% 1/10W 0603", Manufacturer=YAGEO, Resistance=27R, Supplier Part Number 1=311-27GRCT-ND, ComponentLink1Description="Supplier Link", ComponentLink1URL=0R, Manufacturer PN=RC0603JR-0727RL, Supplier=DIGIKEY, Supplier 1=Digi-Key, Supplier PN=311-27GRCT-ND
R2: library part "RES 27 OHM 5% 1/10W 0603", "RES 27 OHM 5% 1/10W 0603", Manufacturer=YAGEO, Resistance=37R, Supplier Part Number 1=311-27GRCT-ND, ComponentLink1Description="Supplier Link", ComponentLink1URL=0R, Manufacturer PN=RC0603JR-0727RL, Supplier=DIGIKEY, Supplier 1=Digi-Key, Supplier PN=311-27GRCT-ND
R3 R4: library part RC0603FR-0710KL, Resistance=10k, ComponentLink1Description="Supplier Link", ComponentLink1URL=https://www.ozdisan.com/pasif-komponentler/direncler/smt-smd-ve-cip-direncler/TC0325B1002T5F, Supplier=OZDISAN, Supplier PN=TC0325B1002T5F
R5: library part RC0603FR-0710KL, Resistance=10R, ComponentLink1Description="Supplier Link", ComponentLink1URL=https://www.ozdisan.com/pasif-komponentler/direncler/smt-smd-ve-cip-direncler/TC0325B1002T5F, Supplier=OZDISAN, Supplier PN=TC0325B1002T5F
R6 R8 R9 R10: library part RC0603FR-071ML, Resistance=2R2, ComponentLink1Description="Supplier Link"
R7: library part RC0603FR-0710KL, "RES.(1608) 0603 1M Ohms 1% 1/10W 25PPM", Resistance=1M, ComponentLink1Description="Supplier Link", ComponentLink1URL=https://www.ozdisan.com/pasif-komponentler/direncler/smt-smd-ve-cip-direncler/TC0325F1004T5F, Supplier=OZDISAN, Supplier PN=TC0325F1004T5F
R11: library part RC0603FR-071ML, Resistance=0R, ComponentLink1Description="Supplier Link"
R12: library part RC0603FR-07100RL, "RES.(1608) 0603 47 Ohms 1% 1/10W AUTOMOTIV", Resistance=47R, ComponentLink1Description="Supplier Link", ComponentLink1URL=https://www.ozdisan.com/pasif-komponentler/direncler/smt-smd-ve-cip-direncler/CQ03SAF470JT5E, Supplier=OZDISAN, Supplier PN=CQ03SAF470JT5E
R13 R18: library part CRCW06030000Z0EAC, Case/Package=Molded, Manufacturer=Vishay, Max Operating Temperature=155°C, Min Operating Temperature=-55°C, Power Rating=100mW, Resistance=0R, Resistor Type="Thick Film", Supplier Part Number 1=541-4012-1-ND, Category="Chip SMD Resistors", ComponentLink1Description=http://www.vishay.com/docs/28773/crcwce3.pdf?src-supplier=Digi-Key, ComponentLink1URL=http://www.vishay.com/docs/28773/crcwce3.pdf?src-supplier=Digi-Key, Contact Plating=Tin, Designed By=Baran, Lead Free="Lead Free", Length=1.55mm, Manufacturer Part Number=CRCW06030000Z0EAC, Mount="Surface Mount", Pricing 1="1=0.10000, 10=0.02900, 100=0.01190, 1000=0.00533, 2500=0.00463 (USD)", RoHS=Yes, RoHS Compliant=Yes, Stock 1=517672, Supplier 1=Digi-Key, Termination=Wraparound
R14 R15 R16 R17 R23 R24 R25: library part RC0603FR-07100RL, "RES.(1608) 0603 47 Ohms 1% 1/10W AUTOMOTIV", Resistance=10K, ComponentLink1Description="Supplier Link", ComponentLink1URL=https://www.ozdisan.com/pasif-komponentler/direncler/smt-smd-ve-cip-direncler/CQ03SAF470JT5E, Supplier=OZDISAN, Supplier PN=CQ03SAF470JT5E
R19 R20 R26 R27 R28: library part RC0603FR-07100RL, "RES.(1608) 0603 47 Ohms 1% 1/10W AUTOMOTIV", Resistance=4K7, ComponentLink1Description="Supplier Link", ComponentLink1URL=https://www.ozdisan.com/pasif-komponentler/direncler/smt-smd-ve-cip-direncler/CQ03SAF470JT5E, Supplier=OZDISAN, Supplier PN=CQ03SAF470JT5E
R21: library part RC0603FR-07100RL, "RES.(1608) 0603 47 Ohms 1% 1/10W AUTOMOTIV", Resistance=330R, ComponentLink1Description="Supplier Link", ComponentLink1URL=https://www.ozdisan.com/pasif-komponentler/direncler/smt-smd-ve-cip-direncler/CQ03SAF470JT5E, Supplier=OZDISAN, Supplier PN=CQ03SAF470JT5E
R22: library part RC0603FR-07100RL, "RES.(1608) 0603 47 Ohms 1% 1/10W AUTOMOTIV", Resistance=2R2, ComponentLink1Description="Supplier Link", ComponentLink1URL=https://www.ozdisan.com/pasif-komponentler/direncler/smt-smd-ve-cip-direncler/CQ03SAF470JT5E, Supplier=OZDISAN, Supplier PN=CQ03SAF470JT5E
U1: library part CMP-0244-00450-1, "Positive Voltage Regulator, 12V, 3-Pin TO-220", ComponentLink1Description="Manufacturer URL", ComponentLink1URL=http://www.st.com, ComponentLink2Description=Datasheet, ComponentLink2URL=http://www.st.com/internet/com/TECHNICAL_RESOURCES/TECHNICAL_LITERATURE/DATASHEET/CD00000444.pdf, ComponentLink3Description="Package Specification", ComponentLink3URL=http://www.st.com/internet/com/TECHNICAL_RESOURCES/TECHNICAL_LITERATURE/PACKAGE_INFORMATION/CD00004649.pdf, DatasheetVersion=16/11/2011, PackageDescription="TO, Thru-Hole, Vertical, Heatsink Mounted; 3 In-Line Leads; Pitch 2.54 mm", PackageReference=TO220, PackageVersion=ver3.0
U2: library part CMP-0244-00485-1, "Positive Voltage Regulator, 5V, 3-Pin TO-220", ComponentLink1Description="Manufacturer URL", ComponentLink1URL=http://www.st.com, ComponentLink2Description=Datasheet, ComponentLink2URL=http://www.st.com/internet/com/TECHNICAL_RESOURCES/TECHNICAL_LITERATURE/DATASHEET/CD00000444.pdf, ComponentLink3Description="Package Specification", ComponentLink3URL=http://www.st.com/internet/com/TECHNICAL_RESOURCES/TECHNICAL_LITERATURE/PACKAGE_INFORMATION/CD00004649.pdf, DatasheetVersion=16/11/2011, PackageDescription="TO, Thru-Hole, Vertical, Heatsink Mounted; 3 In-Line Leads; Pitch 2.54 mm", PackageReference=TO220, PackageVersion=ver3.0
U3: library part CMP-0244-00136-1, "1A, Low Drop Positive Voltage Regulator, 1.8V, 3-Pin DPAK, Tape and Reel", ComponentLink1Description="Manufacturer URL", ComponentLink1URL=http://www.st.com, ComponentLink2Description=Datasheet, ComponentLink2URL=http://www.st.com/internet/com/TECHNICAL_RESOURCES/TECHNICAL_LITERATURE/DATASHEET/CD00002116.pdf, DatasheetVersion=2/12/2011, PackageDescription="3-Pin Transistor Outline Package 2.28 mm Pitch, 9.7 mm Lead Span (DPAK)", PackageReference=TO-252, PackageVersion=2011
U4: library part CMP-0243-00017-5, Ambient Temperature Range High=85°C, Case/Package=LQFP, Frequency=168MHz, Manufacturer Package Identifier=1L_ME_V5, Max Junction Temperature (Tj)=125°C, Max Supply Voltage=3.6V, Min Operating Temperature=-40°C, Min Supply Voltage=1.8V, Nominal Supply Current=1.7µA, Address Bus Width=32b, Core Architecture="ARM Cortex-M4", Data Bus Width=32b, Flash Memory Size=1MB, Height=1.45mm, Interface="CAN, Ethernet, I2C, I2S, IrDA, LIN, SPI, UART, USART, USB", Lead Free="Lead Free", Length=14.2mm, Lifecycle Status=Production, Max Frequency=168MHz, Max Operating Temperature=85°C, Memory Size=1MB, Memory Type=FLASH, NexarPartId=20570110, Number of A/D Converters=3, Number of ADC Channels=16, Number of Channels=16, Number of D/A Converters=2, Number of Ethernet Channels=1, Number of I2C Channels=3, Number of I/Os=82, Number of Pins=100, Number of Programmable I/O=82, Number of PWM Channels=2, Number of SPI Channels=3, Number of Timers/Counters=14, Number of UART Channels=2, Number of USART Channels=4, Number of USB Channels=1, Oscillator Type=Internal, Peripherals="Brown-out Detect/Reset, DMA, I2C, LCD, POR, PWM, WDT", Radiation Hardening=No, RAM Size=192kB, REACH SVHC="No SVHC", RoHS=Compliant, Schedule B="8542310000, 8542310000", Watchdog Timer=Yes, Width=14.2mm
U5: library part CMP-07128-000010-1, "IC REG LINEAR POS ADJ 1.5A D2PAK", Manufacturer="ON Semiconductor", Max Junction Temp=+125°C, Max Supply Voltage=40V, Output Current=1.5A, Output Voltage=1.2-37V, Package=936-03, Temperature="-40°C to +125°C", Temperature Range Low=-40°C, Automotive=No, Category=IC, ComponentLink2Description=Datasheet, ComponentLink2URL=https://www.onsemi.com/pub/Collateral/LM317-D.PDF, Device Class L1="Integrated Circuits (ICs)", Device Class L2="Power Management ICs", Device Class L3="Voltage Regulators - Linear", Digikey Description="IC REG LINEAR POS ADJ 1.5A D2PAK", Footprint Url=https://www.onsemi.com/pub/Collateral/936-03.PDF, Height=4.826mm, Lead Free=Yes, Manufacturer Part Number=LM317BD2TG, Mouser Description="Linear Voltage Regulators 1.5A ADJ 1.2-37V Positive", Number Of Outputs=1, Octopart=https://octopart.com/lm317bd2tg-on+semiconductor-1010532, Output Type=AdjustableProgrammable, RoHS=TRUE, Standoff Height=0mm, Temperature Range High=+125°C

## Nets (pads, with @x,y where several pads share a name; then routed paths per layer and width w, separated by ;. In a path a pad name is that pad's centre, name@x,y a point inside that pad or via, vN(x,y) a via of type N, cw(c..) or ccw(c..) an arc to the next point about the centre after c; other vN are vias at no path point)
+3V3: C13.2 C25.1 C29.1 C30.1 C31.1 C32.1 C33.1 C34.1 FB1.1 J18.1 J?.5 R3.2 R11.1 R13.1 U3.4 U4.11 U4.19 U4.22 U4.28 U4.50 U4.75 U4.100
+5V: C7.2 C8.2 C12.2 U2.3 U3.3
+12V: D3.2 R2.1
+24: D1.2 D2.2
+VDC: C9.2 C10.2 D2.1 D17.2 R1.1
\: D13.2 D14.2 J4.2 J7.2 J8.2 J9.2 J10.2 J11.2 J12.2 Q1.3 Q2.3 R5.1 R19.1 R20.1 R27.1 R28.1
BOOT0: R4.2 U4.94
BTN_L: J13.1 U4.2
BTN_O: J13.2 U4.3
BTN_R: J13.3 U4.4
BZR: J10.1 R22.2
HEATER_B1: Q3.1 R16.1 U4.61
HEATER_B2: Q4.1 R17.1 U4.62
HEATER_T1: Q6.1 R24.1 U4.59
HEATER_T2: Q7.1 R25.1 U4.60
MCU_BZR: B1.3 C1.1 C2.1 C3.1 C4.1 C5.1 C6.1 C7.1 C8.1 C9.1 C10.1 C11.1 C12.1 C13.1 C14.1 C15.1 C18.1 C19.1 C20.2 C21.2 C22.2 C23.2 C24.2 C25.2 C26.2 C27.2 C28.2 C29.2 C30.2 C31.2 C32.2 C33.2 C34.2 C35.2 C36.2 C37.2 C38.2 D20.C J3.3 J13.4 J14.6 J17.2 J18.2 J?.3 Q1.2 Q2.2 Q3.3 Q4.3 Q5.2 Q6.3 Q7.3 R4.1 R5.2 R14.2 R15.2 R16.2 R17.2 R23.2 R24.2 R25.2 U1.2 U2.2 U3.1 U4.10 U4.20 U4.27 U4.63 U4.74 U4.99
MCU_OUT0: Q1.1 R14.1 U4.64
MCU_OUT1: Q2.1 R15.1 U4.65
MD5: D18.C F3.2 J9.1
MD6: D19.C F4.2 J12.1
MD7: D16.C F2.2 J8.1
MD8: D15.C F1.2 J11.1
NetB1_2: B1.2 R21.1 U5.1
NetC1_2: C1.2 C6.2 D3.1 U2.1
NetC3_2: C3.2 C4.2 R1.2 U1.1
NetC5_2: C5.2 C11.2 R2.2 U1.3
NetC14_2: C14.2 J1.2
NetC15_2: C15.2 J2.2
NetC18_2: C18.2 J5.2
NetC19_2: C19.2 J6.2
NetC21_1: C21.1 U4.49
NetC22_1: C22.1 U4.73
NetC35_1: C35.1 C36.1 D17.1 U5.3
NetD12_1: D12.1 J3.1
NetD15_A: D15.A R19.2
NetD16_A: D16.A R20.2
NetD18_A: D18.A R27.2
NetD19_A: D19.A R28.2
NetD20_A: D20.A R26.2
NetF1_1: F1.1 Q3.2
NetF2_1: F2.1 Q4.2
NetF3_1: F3.1 Q6.2
NetF4_1: F4.1 Q7.2
NetFB1_2: FB1.2 R12.2
NetJ14_1: J14.1 R6.2
NetJ14_2: J14.2 R8.2
NetJ14_3: J14.3 R9.2
NetJ14_4: J14.4 R10.2
NetJ14_5: J14.5 R11.2
NetQ5_1: Q5.1 R23.1
NetQ5_3: Q5.3 R22.1
NetR18_1: R18.1 R21.2 U5.4
OSC0: C23.1 R7.2 U4.12 XTAL.1
OSC1: C24.1 R7.1 U4.13 XTAL.2
OUTV: C2.2 D1.1 D13.1 D14.1 J4.1 J7.1
PEDAL: J17.1 U4.5
PIN_ADJ+: C37.1 C38.1 J3.2 R18.2 R26.1
PROX.: D12.2 U4.1
Ptest: U4.25
RST: C20.1 J?.1 R3.1 U4.14
SCR_CS: R10.1 U4.29
SCR_MISO: R8.1 U4.31
SCR_MOSI: R6.1 U4.32
SCR_SCK: R9.1 U4.30
SWCLK: J?.4 U4.77
SWDIO: J?.2 U4.76
TEMP_1: J5.1 U4.15
TEMP_2: J2.1 U4.16
TEMP_3: J6.1 U4.17
TTL_RX: J18.4 U4.26
TTL_TX: J18.3 U4.86
VBAT: C28.1 R13.2 U4.6
VLTMTR: J1.1 J15.1 U4.18
VREF+: C26.1 C27.1 R12.1 U4.21
pads on no net: B1.1 DGND.TP Ptest.TP PWR.TP U4.7 U4.8 U4.9 U4.23 U4.24 U4.33 U4.34 U4.35 U4.36 U4.37 U4.38 U4.39 U4.40 U4.41 U4.42 U4.43 U4.44 U4.45 U4.46 U4.47 U4.48 U4.51 U4.52 U4.53 U4.54 U4.55 U4.56 U4.57 U4.58 U4.66 U4.67 U4.68 U4.69 U4.70 U4.71 U4.72 U4.78 U4.79 U4.80 U4.81 U4.82 U4.83 U4.84 U4.85 U4.87 U4.88 U4.89 U4.90 U4.91 U4.92 U4.93 U4.95 U4.96 U4.97 U4.98